# Altium PCB BMS.PcbDoc (part 1 of 2)
Units mil, origin at the board's own origin, x right, y up, seen from the top; angles counter-clockwise.
Board outline 4370 x 2340 mil, 2 copper layers (Top Layer, Bottom Layer); 173 components, 136 nets, 585 pads, 275 vias.
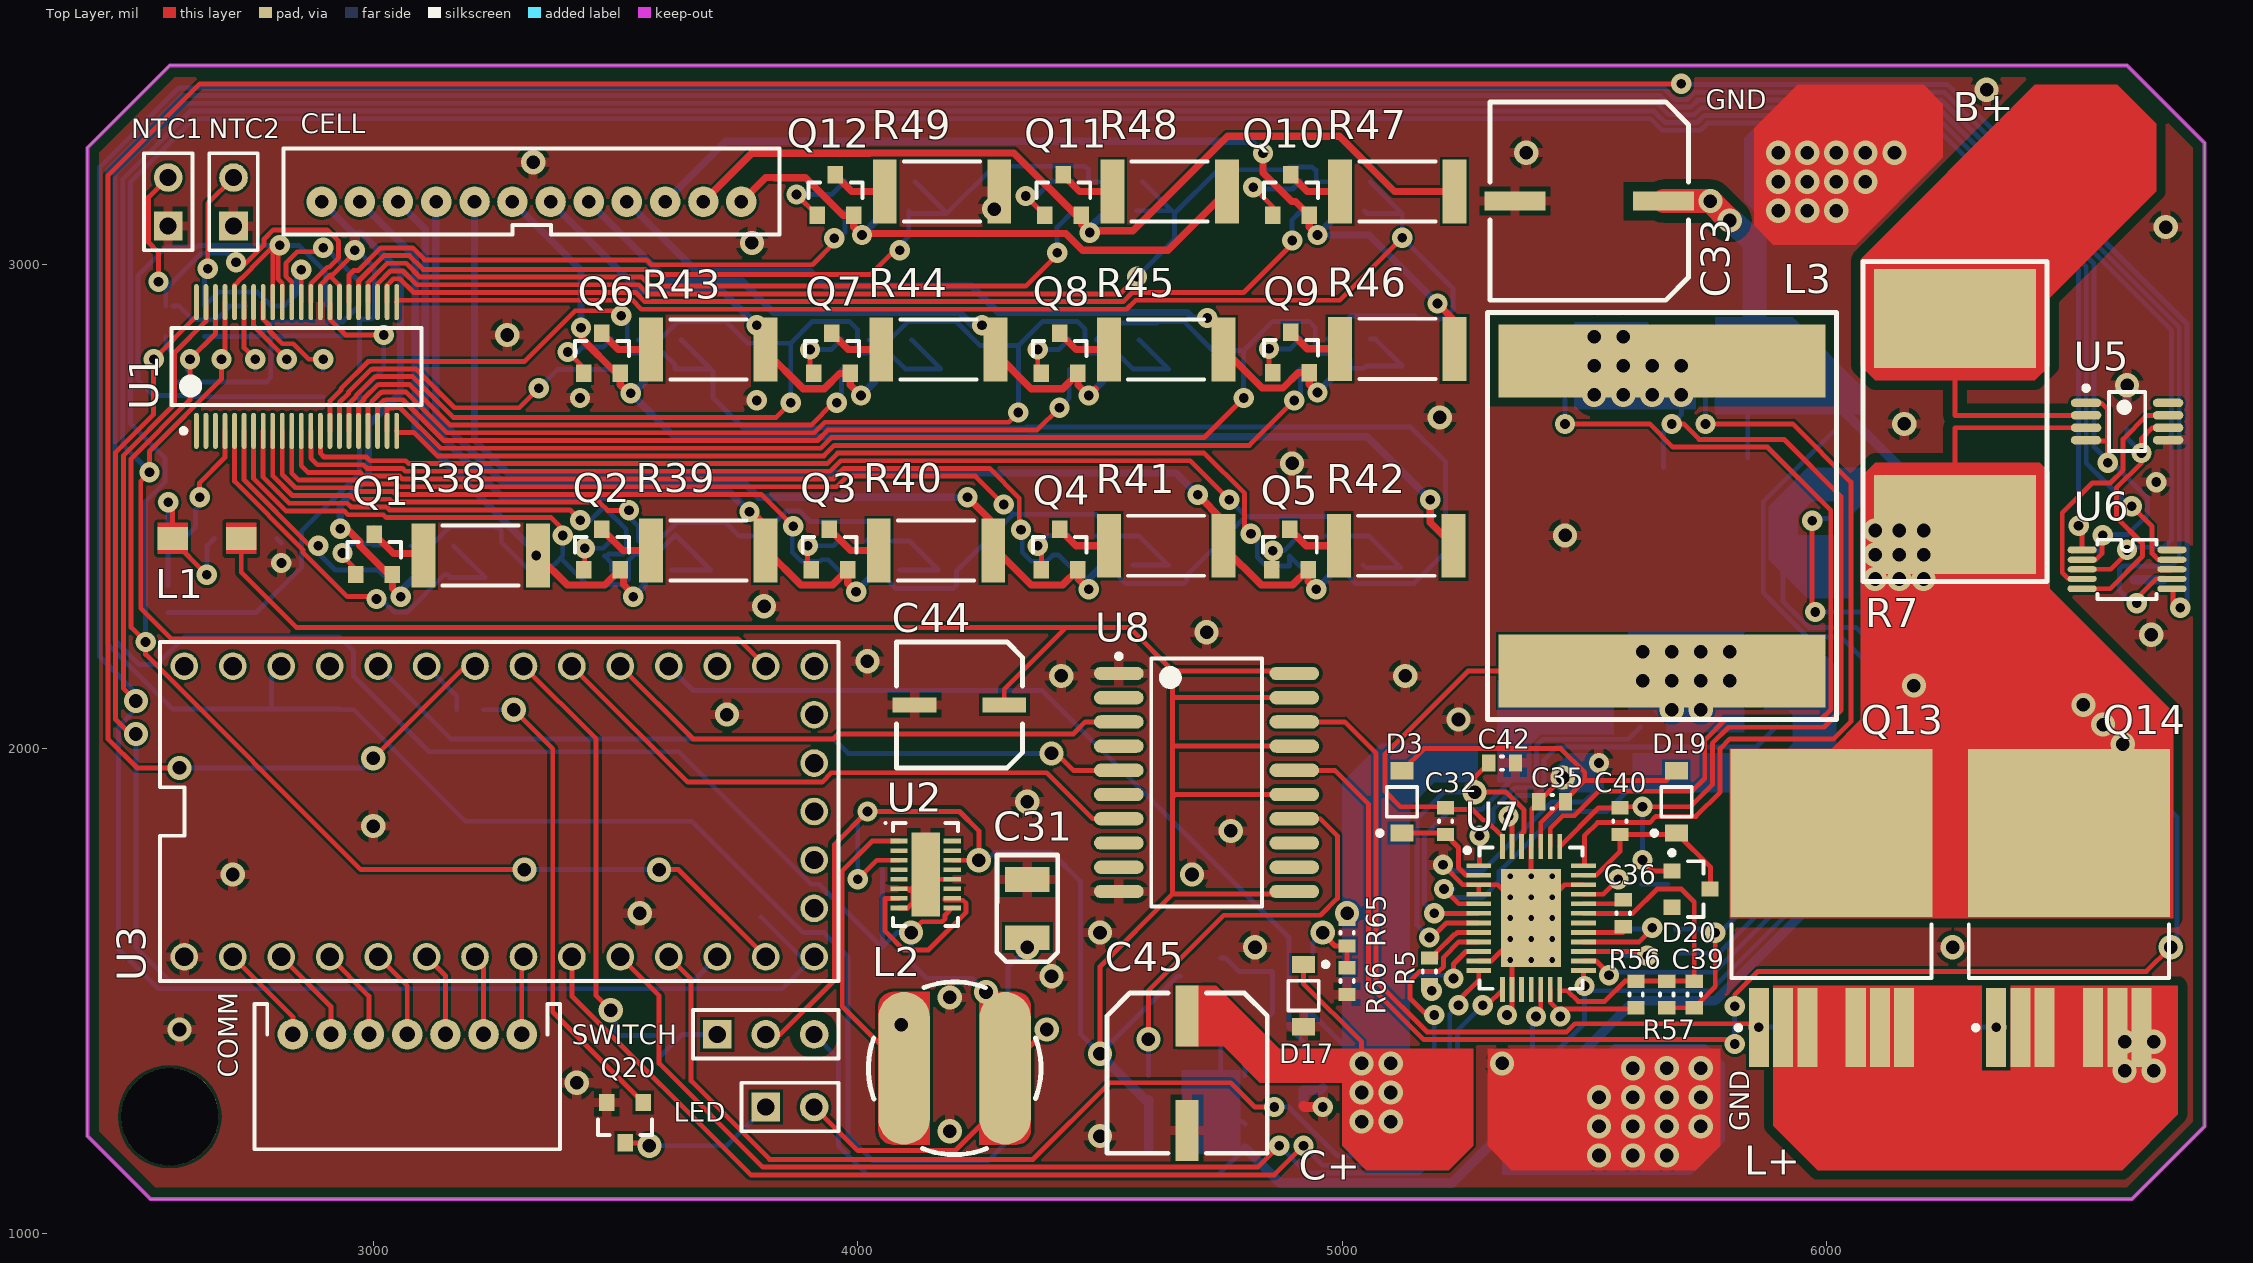
[diagram p0: Top Layer view]
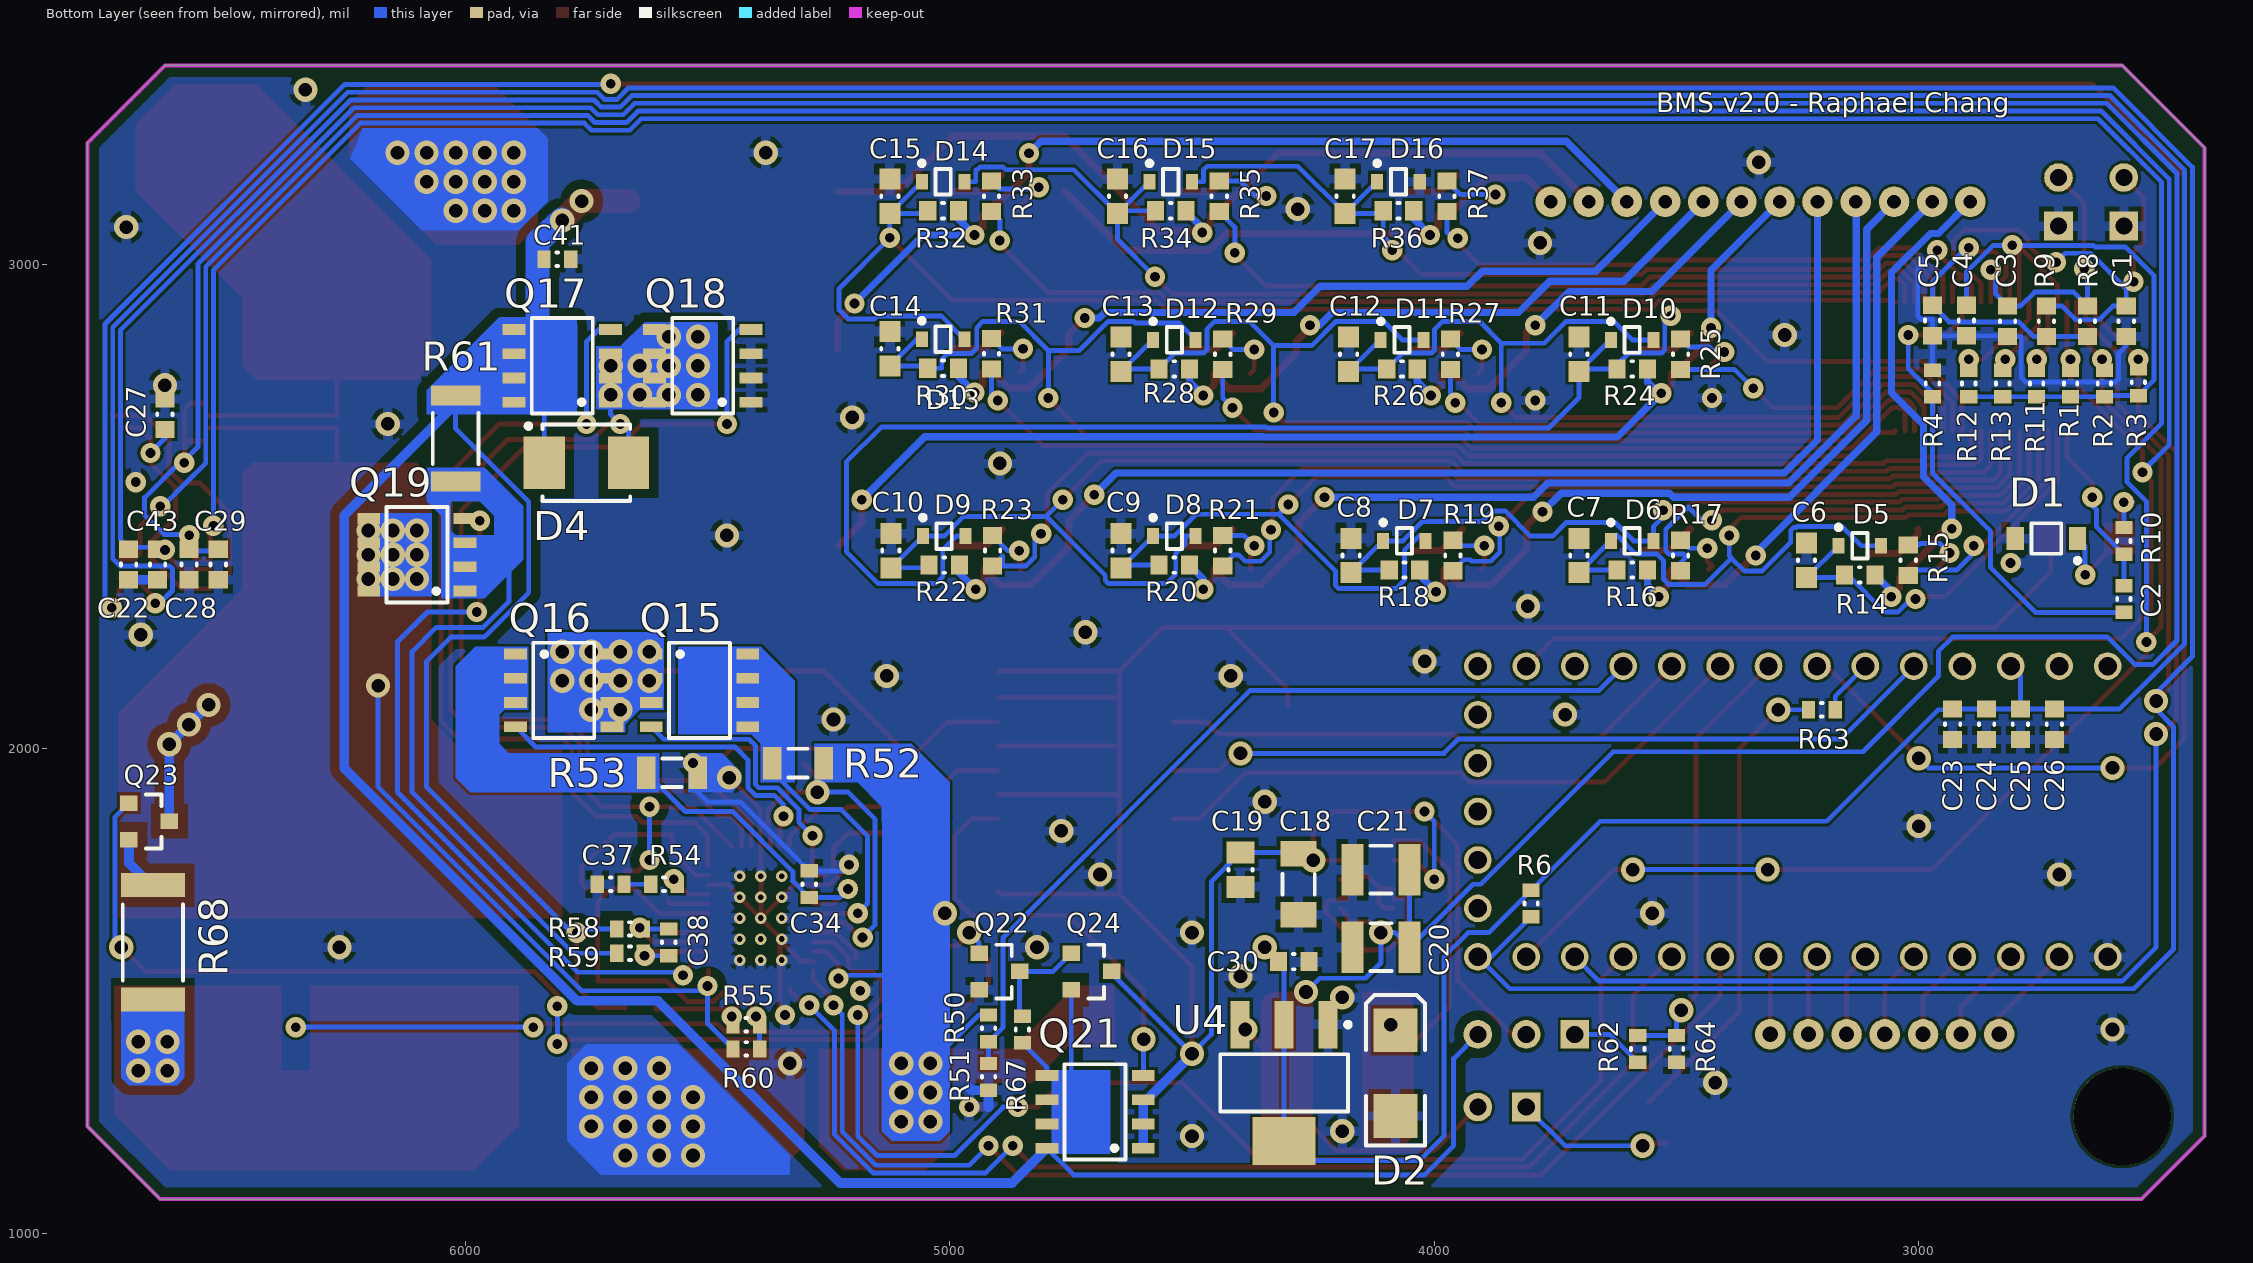
[diagram p1: Bottom Layer view, seen from below]

## Layer stack, top to bottom
Top Solder: solder mask 0.4, Solder Resist, Dk 3.5
Top Layer: signal copper 1.4
Dielectric 1: dielectric 12.6, FR-4, Dk 4.8
Bottom Layer: signal copper 1.4
Bottom Solder: solder mask 0.4, Solder Resist, Dk 3.5

## Board outline
2410,1200 2540,1070 6630,1070 6780,1220 6780,3250 6620,3410 2580,3410 2410,3240

## Design rules (kind name [scope] priority, off if disabled: settings)
Clearance Clearance_12 [InNet('VOUT') vs InNet('GND')] p1: gap=19.68
Clearance Clearance_4 [InNet('GND') vs InNet('VDD')] p2: gap=7.87
Clearance Clearance_11 [InNet('GND') vs InNet('NetQ19_3')] p3: gap=19.68
Clearance Clearance_10 [InNet('GND') vs InNet('NetC40_2')] p4: gap=19.68
Clearance Clearance_9 [InNet('GND') vs OnLayer('Keep-Out Layer')] p5: gap=20
Clearance Clearance_8 [InNet('NetQ17_2') vs InNet('GND')] p6: gap=19.68
Clearance Clearance_7 [InNet('NetQ23_3') vs InNet('GND')] p7: gap=19.68
Clearance Clearance_6 [InNet('NetD4_1') vs InNet('GND')] p8: gap=19.68
Clearance Clearance_5 [InNet('NetC33_1') vs InNet('GND')] p9: gap=19.68
Clearance Clearance_3 [InNet('L+') vs InNet('GND')] p10: gap=19.68
Clearance Clearance_2 [InNet('B+') vs InNet('GND')] p11: gap=19.68
Clearance Clearance_1 [InNet('VBB') vs InNet('GND')] p12: gap=19.68
Clearance [All] p13: gap=5.91
HoleSize [All] p1: absolutevalues=TRUE maxlimit=500 minlimit=1 maxpercent=80.000 minpercent=20.000
PolygonConnect [All] p1: connectstyle=Relief reliefconductorwidth=20 reliefentries=4 polygonreliefangle="90 Angle" airgapwidth=10
RoutingVias [All] p1: holewidth=28 width=50 viastyle="Through Hole" minholewidth=20 minwidth=40 maxholewidth=28 maxwidth=50
SolderMaskExpansion [All] p1: expansion=4
Width [All] p1: maxlimit=500 minlimit=10 preferedwidth=10 minimp=50.000000 maximp=50.000000 favimp=50.000000
29 further rules are at their usual default settings.

## Classes and differential pairs
component class U_Charging: C32 C33 C34 C35 C36 C37 C38 C39 C40 C41 C42 C45 D3 D4 D17 D19 D20 L3 Q15 Q16 Q17 Q18 Q19 Q22 Q24 R5 R50 R51 R52 R53 R54 R55 R56 R57 R58 R59 R60 R61 R65 R66 R67 U7
component class U_LTC6803: C1 C2 C3 C4 C5 C6 C7 C8 C9 C10 C11 C12 C13 C14 C15 C16 C17 CELL D1 D5 D6 D7 D8 D9 D10 D11 D12 D13 D14 D15 D16 L1 NTC1 NTC2 Q1 Q2 Q3 Q4 Q5 Q6 Q7 Q8 Q9 Q10 Q11 Q12 R1 R2 R3 R4 R8 R9 R10 R11 R12 R13 R14 R15 R16 R17 R18 R19 R20 R21 R22 R23 R24 R25 R26 R27 R28 R29 R30 R31 R32 R33 R34 R35 R36 R37 R38 R39 R40 R41 R42 R43 R44 R45 R46 R47 R48 R49 U1
component class U_MCU: C18 C19 C20 C21 C22 C23 C24 C25 C26 C27 C28 C29 C30 C31 C43 C44 COMM D2 L2 LED Q13 Q14 Q20 Q21 Q23 R6 R7 R62 R63 R64 R68 SWITCH U2 U3 U4 U5 U6 U8

## Components (designator, comment, footprint, x,y, rotation, side; value= is the part's Value field where it differs from the comment)
C1 "1uF" CAPC0603(1608)100_N 2571.57,2882.09 r90 bottom
C2 "100nF" CAPC0603(1608)100_L 2576.57,2308.58 r90 bottom
C3 "1uF" CAPC0603(1608)100_N 2816.57,2882.09 r90 bottom
C4 "1uF" CAPC0603(1608)100_N 2901.57,2883.58 r90 bottom
C5 "1uF" CAPC0603(1608)100_N 2971.57,2883.58 r90 bottom
C6 "100nF" CAPC0603(1608)100_M 3231.57,2388.58 r270 bottom
C7 "100nF" CAPC0603(1608)100_M 3701.57,2398.58 r270 bottom
C8 "100nF" CAPC0603(1608)100_M 4171.57,2398.58 r270 bottom
C9 "100nF" CAPC0603(1608)100_M 4646.57,2408.58 r270 bottom
C10 "100nF" CAPC0603(1608)100_M 5121.57,2408.58 r270 bottom
C11 "100nF" CAPC0603(1608)100_M 3701.57,2813.58 r270 bottom
C12 "100nF" CAPC0603(1608)100_M 4176.57,2813.58 r270 bottom
C13 "100nF" CAPC0603(1608)100_M 4646.57,2813.58 r270 bottom
C14 "100nF" CAPC0603(1608)100_M 5123.85,2825 r270 bottom
C15 "100nF" CAPC0603(1608)100_M 5123.85,3140 r270 bottom
C16 "100nF" CAPC0603(1608)100_M 4653.85,3140 r270 bottom
C17 "100nF" CAPC0603(1608)100_M 4183.85,3140 r270 bottom
C18 "10uF" CAPC1206(3216)190_M 4280,1720 r90 bottom
C19 "4.7uF" CAPC0805(2012)145_N 4400,1750 r270 bottom
C20 "100uF" CAPC1210(3225)280_N 4110,1590 r180 bottom
C21 "100uF" CAPC1210(3225)280_N 4110,1750 r180 bottom
C22 "2.2uF" CAPC0603(1608)55_N 6695,2380 r90 bottom
C23 "2.2uF" CAPC0603(1608)55_N 2930,2050 r90 bottom
C24 "2.2uF" CAPC0603(1608)55_N 2860,2050 r90 bottom
C25 "2.2uF" CAPC0603(1608)55_N 2790,2050 r90 bottom
C26 "2.2uF" CAPC0603(1608)55_N 2720,2050 r90 bottom
C27 "0.1uF" CAPC0603(1608)55_N 6620,2690 r270 bottom
C28 "2.2uF" CAPC0603(1608)100_N 6570,2380 r90 bottom
C29 "2.2uF" CAPC0603(1608)100_N 6510,2380 r90 bottom
C30 "2.2uF" CAPC0603(1608)55_N 4290,1560 r180 bottom
C31 "100uF" AVX-CAPC7343_V 4350,1670 r90 top
C32 "1uF" CAPC0603(1608)100_L 5213.31,1850 r90 top
C33 "" "CAP 180UF 50V" 5510,3130 r270 top
C34 "33nF" CAPC0603(1608)100_L 5290,1720 r90 bottom
C35 "4.7uF" CAPC0603(1608)55_L 5433.31,1890 r0 top
C36 "2nF" CAPC0603(1608)100_L 5580,1660 r90 top
C37 "680pF" CAPC0603(1608)100_L 5700,1720 r0 bottom
C38 "0.33uF" CAPC0603(1608)100_L 5580,1600 r90 bottom
C39 "1.5nF" CAPC0603(1608)100_L 5726.69,1492.44 r270 top
C40 "1uF" CAPC0603(1608)100_L 5573.31,1850 r90 top
C41 "0.1uF" CAPC0603(1608)100_L 5810,3010 r0 bottom
C42 "1uF" CAPC0603(1608)100_L 5330,1970 r180 top
C43 "2.2uF" CAPC0603(1608)55_N 6635,2380 r90 bottom
C44 "" "CAP 300UF 6.3V" 4210,2090 r270 top
C45 "150uF" "CAP 150UF 25V" 4680,1330 r0 top
CELL "" JST-6-PTH-VERT 3326.57,3128.58 r0 top (schematic designator JP1)
COMM "" JST-7-PTH 3070,1410 r180 top (schematic designator JP2)
D1 "" SOD-123 2736.57,2433.58 r0 bottom
D2 "" SMB 4080,1330 r90 bottom
D3 "SBR0560S1" SOD-123 5123.31,1890 r90 top
D4 "MBRS360" ONSC-SMB-2-403A-03_H_V 5750,2590 r180 bottom
D5 "" ONSC-SOD-323-2-477-02_V 3121.57,2418.58 r180 bottom
D6 "" ONSC-SOD-323-2-477-02_V 3591.57,2428.58 r180 bottom
D7 "" ONSC-SOD-323-2-477-02_V 4061.57,2428.58 r180 bottom
D8 "" ONSC-SOD-323-2-477-02_V 4536.57,2438.58 r180 bottom
D9 "" ONSC-SOD-323-2-477-02_V 5011.57,2438.58 r180 bottom
D10 "" ONSC-SOD-323-2-477-02_V 3591.57,2843.58 r180 bottom
D11 "" ONSC-SOD-323-2-477-02_V 4066.57,2843.58 r180 bottom
D12 "" ONSC-SOD-323-2-477-02_V 4536.57,2843.58 r180 bottom
D13 "" ONSC-SOD-323-2-477-02_V 5013.85,2845 r180 bottom
D14 "" ONSC-SOD-323-2-477-02_V 5013.85,3170 r180 bottom
D15 "" ONSC-SOD-323-2-477-02_V 4543.85,3170 r180 bottom
D16 "" ONSC-SOD-323-2-477-02_V 4073.85,3170 r180 bottom
D17 "" ONSC-SOD-123-2-425-04_V 4920,1490 r270 top
D19 "SBR0560S1" SOD-123 5690,1890 r90 top
D20 "BZX84C6V2L" ONSC-SOT-23-3-318-08_V 5720,1710 r0 top
L1 "" MURA-BLM31-B60-CHIP-2_V3 2656.57,2433.58 r180 top
L2 "SDR0805-180ML" SDR0805-180ML 4200,1340 r0 top
L3 "22uH" IHLP-6767GZ 5660,2480 r90 top
LED "Header 2" HDR1X2 3810,1260 r0 top (schematic designator P4)
NTC1 "Header 2" HDR1X2 2576.57,3078.58 r90 top (schematic designator P1)
NTC2 "Header 2" HDR1X2 2711.57,3078.58 r90 top (schematic designator P2)
Q1 "MOSFET-P" SOT23-3 3001.57,2398.58 r0 top
Q2 "MOSFET-P" SOT23-3 3471.57,2408.58 r0 top
Q3 "MOSFET-P" SOT23-3 3941.57,2408.58 r0 top
Q4 "MOSFET-P" SOT23-3 4416.57,2408.58 r0 top
Q5 "MOSFET-P" SOT23-3 4891.57,2408.58 r0 top
Q6 "MOSFET-P" SOT23-3 3471.57,2813.58 r0 top
Q7 "MOSFET-P" SOT23-3 3946.57,2813.58 r0 top
Q8 "MOSFET-P" SOT23-3 4416.57,2813.58 r0 top
Q9 "MOSFET-P" SOT23-3 4893.85,2815 r0 top
Q10 "MOSFET-P" SOT23-3 4893.85,3140 r0 top
Q11 "MOSFET-P" SOT23-3 4423.85,3140 r0 top
Q12 "MOSFET-P" SOT23-3 3953.85,3140 r0 top
Q13 "MOSFET-N" DPAK127P1525X483-7N 6010,1670 r90 top
Q14 "MOSFET-N" DPAK127P1525X483-7N 6500,1670 r90 top
Q15 "MOSFET-N" SOIC127P600X175-8N 5516.69,2120 r180 bottom
Q16 "MOSFET-N" SOIC127P600X175-8N 5796.69,2120 r180 bottom
Q17 "MOSFET-N" SOIC127P600X175-8N 5800,2790 r0 bottom
Q18 "MOSFET-N" SOIC127P600X175-8N 5510,2790 r0 bottom
Q19 "MOSFET-P" SOIC127P600X175-8N 6100,2400 r0 bottom
Q20 "MOSFET-N" SOT23-3 3520,1230 r180 top
Q21 "MOSFET-N" SOIC127P600X175-8N 4700,1250 r0 bottom
Q22 "MOSFET-N" SOT23-3 4900,1540 r270 bottom
Q23 "MOSFET-N" SOT23-3 6655,1850 r270 bottom
Q24 "MOSFET-P" SOT23-3 4710,1540 r270 bottom
R1 "1M" RESC0603(1608)_L 2686.57,2753.58 r90 bottom
R2 "1M" RESC0603(1608)_L 2616.57,2753.58 r90 bottom
R3 "1M" RESC0603(1608)_L 2546.57,2756.02 r90 bottom
R4 "100R" RESC0603(1608)_L 2971.57,2753.58 r270 bottom
R5 "120K" RESC0603(1608)_L 5180,1540 r270 top
R6 "1K" RESC0603(1608)_L 3800,1680 r270 bottom
R7 "" WSLP5931 6265,2675 r90 top
R8 "100K" RESC0603(1608)_N 2651.57,2882.09 r270 bottom
R9 "100K" RESC0603(1608)_N 2736.57,2882.09 r270 bottom
R10 "100R" RESC0603(1608)_L 2576.57,2428.58 r90 bottom
R11 "1M" RESC0603(1608)_L 2756.57,2753.58 r90 bottom
R12 "1M" RESC0603(1608)_L 2896.57,2753.58 r90 bottom
R13 "1M" RESC0603(1608)_L 2826.57,2753.58 r90 bottom
R14 "100R" RESC0603(1608)_N 3121.57,2358.58 r180 bottom
R15 "3K3" RESC0603(1608)_N 3021.57,2388.58 r90 bottom
R16 "100R" RESC0603(1608)_N 3591.57,2368.58 r180 bottom
R17 "3K3" RESC0603(1608)_N 3491.57,2398.58 r90 bottom
R18 "100R" RESC0603(1608)_N 4061.57,2368.58 r180 bottom
R19 "3K3" RESC0603(1608)_N 3961.57,2398.58 r90 bottom
R20 "100R" RESC0603(1608)_N 4536.57,2378.58 r180 bottom
R21 "3K3" RESC0603(1608)_N 4436.57,2408.58 r90 bottom
R22 "100R" RESC0603(1608)_N 5011.57,2378.58 r180 bottom
R23 "3K3" RESC0603(1608)_N 4911.57,2408.58 r90 bottom
R24 "100R" RESC0603(1608)_N 3591.57,2783.58 r180 bottom
R25 "3K3" RESC0603(1608)_N 3491.57,2813.58 r90 bottom
R26 "100R" RESC0603(1608)_N 4066.57,2783.58 r180 bottom
R27 "3K3" RESC0603(1608)_N 3966.57,2813.58 r90 bottom
R28 "100R" RESC0603(1608)_N 4536.57,2783.58 r180 bottom
R29 "3K3" RESC0603(1608)_N 4436.57,2813.58 r90 bottom
R30 "100R" RESC0603(1608)_N 5013.85,2785 r180 bottom
R31 "3K3" RESC0603(1608)_N 4913.85,2815 r90 bottom
R32 "100R" RESC0603(1608)_N 5013.85,3110 r180 bottom
R33 "3K3" RESC0603(1608)_N 4913.85,3140 r90 bottom
R34 "100R" RESC0603(1608)_N 4543.85,3110 r180 bottom
R35 "3K3" RESC0603(1608)_N 4443.85,3140 r90 bottom
R36 "100R" RESC0603(1608)_N 4073.85,3110 r180 bottom
R37 "3K3" RESC0603(1608)_N 3973.85,3140 r90 bottom
R38 "3R3" RESC2512(6432)_N 3221.57,2398.58 r180 top
R39 "3R3" RESC2512(6432)_N 3691.57,2408.58 r180 top
R40 "3R3" RESC2512(6432)_N 4161.57,2408.58 r180 top
R41 "3R3" RESC2512(6432)_N 4636.57,2418.58 r180 top
R42 "3R3" RESC2512(6432)_N 5111.57,2418.58 r180 top
R43 "3R3" RESC2512(6432)_N 3691.57,2823.58 r180 top
R44 "3R3" RESC2512(6432)_N 4166.57,2823.58 r180 top
R45 "3R3" RESC2512(6432)_N 4636.57,2823.58 r180 top
R46 "3R3" RESC2512(6432)_N 5113.85,2825 r180 top
R47 "3R3" RESC2512(6432)_N 5113.85,3150 r180 top
R48 "3R3" RESC2512(6432)_N 4643.85,3150 r180 top
R49 "3R3" RESC2512(6432)_N 4173.85,3150 r180 top
R50 "18K" RESC0603(1608)_L 4920,1422.44 r90 bottom
R51 "3K6" RESC0603(1608)_L 4920,1322.44 r90 bottom
R52 "0.004R" RESC1206(3216)_L 5313.31,1970 r180 bottom
R53 "0.004R" RESC1206(3216)_L 5573.31,1950 r0 bottom
R54 "33K" RESC0603(1608)_L 5590,1720 r0 bottom
R55 "10K7" RESC0603(1608)_L 5420,1430 r180 bottom
R56 "10K7" RESC0603(1608)_L 5606.69,1492.44 r90 top
R57 "174K" RESC0603(1608)_L 5670,1492.44 r270 top
R58 "100R" RESC0603(1608)_L 5660,1627.56 r0 bottom
R59 "100R" RESC0603(1608)_L 5660,1577.56 r0 bottom
R60 "174K" RESC0603(1608)_L 5420,1380 r0 bottom
R61 "0.0082R" RESC2010(5025)_L 6020,2640 r90 bottom
R62 "464K" RESC0603(1608)_L 3580,1380 r270 bottom
R63 "100R" RESC0603(1608)_L 3200,2080 r0 bottom
R64 "36K" RESC0603(1608)_L 3500,1380 r90 bottom
R65 "10K" RESC0603(1608)_L 5010,1620 r90 top
R66 "3K6" RESC0603(1608)_L 5010,1520 r90 top
R67 "10K" RESC0603(1608)_L 4850,1420 r270 bottom
R68 "750R" RESC2512(6432)_N 6645,1600 r90 bottom (schematic designator R71)
SWITCH "Header 3" HDR1X3 3710,1410 r0 top (schematic designator P3)
U1 "LTC6803HG-3#PBF" LT-G-44_L 2841.57,2788.58 r90 top
U2 "LTC3637" SON50P300X85_HS-17N 4140,1740 r0 top
U3 "" TEENSY_3.0_BASIC 3260,1870 r90 top
U4 "TC2117" SOT-223-DB3_M 4310,1310 r270 bottom
U5 "LT1999" LT-MS8-8_N 6620,2675 r0 top
U6 "LTC2480" MSOP10 6620,2370 r0 top
U7 "LTC4020EUHF" QFN38 5390,1650 r0 top
U8 "LT1161" LT-SW-20_M 4720,1930 r0 top

## Footprints (in the part's own frame and the unit in brackets; to place one, negate y for a bottom-side part, rotate by r counter-clockwise, add the part's x,y. Pads: shape width x height; smd on the part's side, far side on the other; paste and mask are expansions set on the pad)
AVX-CAPC7343_V [mm] "SMT Capacitor, 2 Leads, Body 7.3x4.3mm"
  rect 1.3x2.35 smd: 1(-1.535,0.001) 2(1.515,0.001)
  silkscreen extent -2.8,-1.6 2.8,1.6, body extent -2.1,-1.1 2.1,1.1, height 1.9
"CAP 150UF 25V" [mm]
  rect 1.2x3.2 smd: 1(0,3) 2(0,-3)
  silkscreen extent -4.2,-4.2 4.2,4.2, body extent -4.25,-5 4.25,5, height 10.5
"CAP 180UF 50V" [mm]
  rect 1x3.2 smd: 1(0,3.9) 2(0,-3.9)
  silkscreen extent -5.2,-5.2 5.2,5.2, body extent -5.2,-5.45 5.1,5.45, height 10.2
"CAP 300UF 6.3V" [mm]
  rect 0.8x2.3 smd: 1(0,2.35) 2(0,-2.35)
  silkscreen extent -3.3,-3.3 3.3,3.3, body extent -3.4,-3.9 3.4,3.9, height 5.5
CAPC0603(1608)55_L [mm] "Chip Capacitor, Body 1.6x0.8mm, Height 0.55mm, IPC High Density"
  rect 0.7x0.9 smd: 1(-0.7,0) 2(0.7,0)
  silkscreen extent -0.05,-0.35 0.05,0.35, body extent -0.87,-0.47 0.88,0.48, height 0.55
CAPC0603(1608)55_N [mm] "Chip Capacitor, Body 1.6x0.8mm, Height 0.55mm, IPC Medium Density"
  rect 0.9x1 smd: 1(-0.8,0) 2(0.8,0)
  silkscreen extent -0.05,-0.4 0.05,0.4, body extent -0.87,-0.48 0.88,0.47, height 0.55
CAPC0603(1608)100_L [mm] "Chip Capacitor, Body 1.6x0.8mm, Height 1.0mm, IPC High Density"
  rect 0.7x0.9 smd: 1(-0.7,0) 2(0.7,0)
  silkscreen extent -0.05,-0.35 0.05,0.35, body extent -0.87,-0.47 0.88,0.48, height 1
CAPC0603(1608)100_M [mm] "Chip Capacitor, Body 1.6x0.8mm, Height 1.0mm, IPC Low Density"
  rect 1.1x1.1 smd: 1(-0.9,0) 2(0.9,0)
  silkscreen extent -0.05,-0.45 0.05,0.45, body extent -0.87,-0.47 0.88,0.48, height 1
CAPC0603(1608)100_N [mm] "Chip Capacitor, Body 1.6x0.8mm, Height 1.0mm, IPC Medium Density"
  rect 0.9x1 smd: 1(-0.8,0) 2(0.8,0)
  silkscreen extent -0.05,-0.4 0.05,0.4, body extent -0.87,-0.48 0.88,0.47, height 1
CAPC0805(2012)145_N [mm] "Chip Capacitor, Body 2.0x1.2mm, Height 1.45mm, IPC Medium Density"
  rect 1.15x1.45 smd: 1(-0.9,0) 2(0.9,0)
  silkscreen extent -0.05,-0.62 0.05,0.63, body extent -1.1,-0.72 1.1,0.73, height 1.45
CAPC1206(3216)190_M [mm] "Chip Capacitor, Body 3.2x1.6mm, Height 1.9mm, IPC Low Density"
  rect 1.35x1.9 smd: 1(-1.6,0) 2(1.6,0)
  silkscreen extent -0.55,-0.85 0.55,0.85, body extent -1.7,-0.9 1.7,0.9, height 1.9
CAPC1210(3225)280_N [mm] "Chip Capacitor, Body 3.2x2.5mm, Height 2.8mm, IPC Medium Density"
  rect 1.15x2.7 smd: 1(-1.5,0) 2(1.5,0)
  silkscreen extent -0.55,-1.25 0.55,1.25, body extent -1.7,-1.4 1.7,1.4, height 2.8
DPAK127P1525X483-7N [mm] "D2-PAK, 7-Pads, Body 7.93x8.63mm (max), IPC Medium Density"
  rect 4.15x1.05 smd mask+0.051: 1(-6.25,3.81) 2(-6.25,-3.81) 2(-6.25,-2.54) 2(-6.25,-1.27) 2(-6.25,1.27) 2(-6.25,2.54)
  rect 8.8x10.6 smd: 8(3.95,0)
  silkscreen extent -6.37,-5.25 -0.85,5.25, body extent -7,-5 8,5, height 4.2
HDR1X2 [mm] "Connector; Header; 2 Position"
  rect 1.5x1.5 hole 0.9: 1(0,0)
  round 1.5 hole 0.9: 2(2.54,0)
  silkscreen extent -1.27,-1.27 3.81,1.27
HDR1X3 [mm] "Connector; Header; 3 Position"
  rect 1.5x1.5 hole 0.9: 1(0,0)
  round 1.5 hole 0.9: 2(2.54,0) 3(5.08,0)
  silkscreen extent -1.27,-1.27 6.35,1.27
IHLP-6767GZ [mil]
  rect 150x675 smd: 1(-320,0) 2(320,0)
  silkscreen extent -420,-360 420,360, body extent -331,-331 331,331, height 197
JST-6-PTH-VERT [mil]
  round 63 hole 28: 1(-433.07,0) 2(-354.33,0) 3(-275.59,0) 4(-196.59,0) 5(-117.59,0) 6(-39.37,0) 7(39.37,0) 8(118.11,0) 9(196.85,0) 10(275.85,0) 11(354.85,0) 12(433.07,0)
  silkscreen extent -512,-68 512,110, body extent -512,-71 508,106, height 236
JST-7-PTH [mil]
  round 63 hole 31.5: 1(-236.48,0) 2(-157.74,0) 3(-79,0) 4(0,0) 5(79,0) 6(157.22,0) 7(235.96,0)
  silkscreen extent -315,-63 315,237, body extent -356,-8 350,252, height 198
LT-G-44_L [mm] "SOP, 44-Leads, Body 13.1x5.6mm, Pitch 0.5mm, IPC High Density"
  oval 1.9x0.25 smd: 1(-3.375,5.25) 2(-3.375,4.75) 3(-3.375,4.25) 4(-3.375,3.75) 5(-3.375,3.25) 6(-3.375,2.75) 7(-3.375,2.25) 8(-3.375,1.75) 9(-3.375,1.25) 10(-3.375,0.75) 11(-3.375,0.25) 12(-3.375,-0.25) 13(-3.375,-0.75) 14(-3.375,-1.25) 15(-3.375,-1.75) 16(-3.375,-2.25) 17(-3.375,-2.75) 18(-3.375,-3.25) 19(-3.375,-3.75) 20(-3.375,-4.25) 21(-3.375,-4.75) 22(-3.375,-5.25) 23(3.375,-5.25) 24(3.375,-4.75) 25(3.375,-4.25) 26(3.375,-3.75) 27(3.375,-3.25) 28(3.375,-2.75) 29(3.375,-2.25) 30(3.375,-1.75) 31(3.375,-1.25) 32(3.375,-0.75) 33(3.375,-0.25) 34(3.375,0.25) 35(3.375,0.75) 36(3.375,1.25) 37(3.375,1.75) 38(3.375,2.25) 39(3.375,2.75) 40(3.375,3.25) 41(3.375,3.75) 42(3.375,4.25) 43(3.375,4.75) 44(3.375,5.25)
  silkscreen extent -3.5,-6.55 2.02,6.55, body extent -2.8,-6.55 2.8,6.55, height 2
LT-MS8-8_N [mm] "SOP, 8-Leads, Body 3x3mm, Pitch 0.65mm, IPC Medium Density"
  oval 1.6x0.45 smd: 1(-2.15,0.975) 2(-2.15,0.325) 3(-2.15,-0.325) 4(-2.15,-0.975) 5(2.15,-0.975) 6(2.15,-0.325) 7(2.15,0.325) 8(2.15,0.975)
  silkscreen extent -2.27,-1.55 0.95,1.87, body extent -1.55,-1.55 1.55,1.55, height 1.1
LT-SW-20_M [mm] "SOIC, 20-Leads, Body 12.8x7.49mm, Pitch 1.27mm, IPC Low Density"
  oval 2.6x0.7 smd: 1(-4.6,5.715) 2(-4.6,4.445) 3(-4.6,3.175) 4(-4.6,1.905) 5(-4.6,0.635) 6(-4.6,-0.635) 7(-4.6,-1.905) 8(-4.6,-3.175) 9(-4.6,-4.445) 10(-4.6,-5.715) 11(4.6,-5.715) 12(4.6,-4.445) 13(4.6,-3.175) 14(4.6,-1.905) 15(4.6,-0.635) 16(4.6,0.635) 17(4.6,1.905) 18(4.6,3.175) 19(4.6,4.445) 20(4.6,5.715)
  silkscreen extent -4.72,-6.5 2.9,6.74, body extent -3.8,-6.5 3.8,6.5, height 2.65
MSOP10 [mm]
  oval 1.53x0.36 smd mask+0.076: 0(-2.352,1.02) 4(-2.352,-1.02) 5(2.353,1.02) 9(2.353,-1.02)
  oval 1.53x0.32 smd mask+0.076: 1(-2.352,0.5) 2(-2.352,0) 3(-2.352,-0.5) 6(2.353,0.5) 7(2.353,0) 8(2.353,-0.5)
  silkscreen extent -1.55,-1.55 1.55,1.55, body extent -1.5,-1.5 1.5,1.5, height 1
MURA-BLM31-B60-CHIP-2_V3 [mm] "Chip Ferrite Bead, 2-Leads, Body 3.2x1.6mm, Height 1.3mm, 70um Land Pad Thickness, 6A Rated Current"
  rect 1.6x1.2 smd: 1(-1.8,0) 2(1.8,0)
  Top Layer region: 2.6,0.825 1,0.825 1,-0.825 2.6,-0.825
  Top Layer region: -2.6,-0.825 -1,-0.825 -1,0.825 -2.6,0.825
  body extent -1.6,-0.8 1.6,0.8, height 1.3
ONSC-SMB-2-403A-03_H_V [mil] "Molded, 2-Leads, Body 4.6x3.95mm"
  rect 85x107.99 smd: 1(-87.01,0) 2(87.01,0)
  silkscreen extent -125,-79 91,81, body extent -91,-78 91,78, height 95
ONSC-SOD-123-2-425-04_V [mm] "SOD, 2-Leads, Body 2.69x1.6mm"
  rect 0.91x1.22 smd: 1(-1.635,0) 2(1.635,0)
  silkscreen extent -1.76,-0.8 0.78,1.29, body extent -1.35,-0.8 1.35,0.8, height 1.35
ONSC-SOD-323-2-477-02_V [mm] "SOD, 2-Leads, Body 1.7x1.25mm"
  rect 0.63x0.83 smd: 1(-1.115,0) 2(1.115,0)
  silkscreen extent -1.24,-0.67 0.4,1.09, body extent -0.85,-0.63 0.85,0.63, height 1.06
ONSC-SOT-23-3-318-08_V [mm] "SOT23, 3-Leads, Body 2.92x1.3mm, Pitch 0.95mm"
  rect 0.9x0.8 smd: 1(-1,0.95) 2(-1,-0.95) 3(1,0)
  silkscreen extent -1.12,-1.46 0.65,2.02, body extent -0.65,-1.46 0.65,1.46, height 1.11
QFN38 [mm] "QFN, 38-Leads, Body 5,00x7,00mm, Pitch 0,50mm, Thermal Pad 3,25x5,75mm, IPC Medium Density"
  rect 1.3x0.25 smd: 1(-2.75,2.75) 2(-2.75,2.25) 3(-2.75,1.75) 4(-2.75,1.25) 5(-2.75,0.75) 6(-2.75,0.25) 7(-2.75,-0.25) 8(-2.75,-0.75) 9(-2.75,-1.25) 10(-2.75,-1.75) 11(-2.75,-2.25) 12(-2.75,-2.75) 20(2.75,-2.75) 21(2.75,-2.25) 22(2.75,-1.75) 23(2.75,-1.25) 24(2.75,-0.75) 25(2.75,-0.25) 26(2.75,0.25) 27(2.75,0.75) 28(2.75,1.25) 29(2.75,1.75) 30(2.75,2.25) 31(2.75,2.75)
  rect 0.25x1.3 smd: 13(-1.5,-3.75) 14(-1,-3.75) 15(-0.5,-3.75) 16(0,-3.75) 17(0.5,-3.75) 18(1,-3.75) 19(1.5,-3.75) 32(1.5,3.75) 33(1,3.75) 34(0.5,3.75) 35(0,3.75) 36(-0.5,3.75) 37(-1,3.75) 38(-1.5,3.75)
  rect 3.15x5.15 smd: 39(0,0)
  silkscreen extent -3.47,-3.7 2.7,3.7, body extent -2.55,-3.55 2.55,3.55, height 0.75
RESC0603(1608)_L [mm] "Chip Resistor, Body 1.6x0.8mm, IPC High Density"
  rect 0.7x0.9 smd: 1(-0.7,0) 2(0.7,0)
  silkscreen extent -0.05,-0.35 0.05,0.35, body extent -0.85,-0.47 0.85,0.47, height 0.6
RESC0603(1608)_N [mm] "Chip Resistor, Body 1.6x0.8mm, IPC Medium Density"
  rect 0.9x1 smd: 1(-0.8,0) 2(0.8,0)
  silkscreen extent -0.05,-0.4 0.05,0.4, body extent -0.85,-0.47 0.85,0.47, height 0.6
RESC1206(3216)_L [mm] "Chip Resistor, Body 3.2x1.6mm, IPC High Density"
  rect 0.95x1.7 smd: 1(-1.35,0) 2(1.35,0)
  silkscreen extent -0.5,-0.75 0.5,0.75, body extent -1.67,-0.87 1.67,0.87, height 0.75
RESC2010(5025)_L [mm] "Chip Resistor, Body 5.0x2.5mm, IPC High Density"
  rect 1.05x2.6 smd: 1(-2.25,0) 2(2.25,0)
  silkscreen extent -1.35,-1.2 1.35,1.2, body extent -2.6,-1.35 2.6,1.35, height 0.71
RESC2512(6432)_N [mm] "Chip Resistor, Body 6.4x3.2mm, IPC Medium Density"
  rect 1.25x3.35 smd: 1(-3,0) 2(3,0)
  silkscreen extent -2,-1.57 2,1.58, body extent -3.25,-1.7 3.25,1.7, height 0.75
SDR0805-180ML [mm]
  rrect100% 2.7x8 smd: 1(-2.65,0) 2(2.65,0)
  Top Layer region: -3.25,4 -1.3,4 -1.3,-4 -3.25,-4 -3.537,-3.943 -3.78,-3.78 -3.943,-3.537 -4,-3.25 -4,-3.25 -4,3.25 -3.943,3.537 -3.78,3.78 -3.537,3.943 -3.25,4
  Top Layer region: 3.25,4 1.3,4 1.3,-4 3.25,-4 3.537,-3.943 3.78,-3.78 3.943,-3.537 4,-3.25 4,-3.25 4,3.25 3.943,3.537 3.78,3.78 3.537,3.943 3.25,4
  silkscreen extent -4.52,-4.53 4.52,4.52, body extent -3.9,-3.9 3.9,3.9, height 5.3
SMB [mm] "DO-214-AA/SMB; 2 C-Bend Leads; Body 5.3 x 3.6 mm, inc. leads (LxW)"
  rect 2.3x2.3 smd: 1(-2.25,0) 2(2.25,0)
  silkscreen extent -3.8,-1.55 4.1,1.55
SOD-123 [mm] "SOD, 2-Leads, Body 2.69x1.6mm"
  rect 0.91x1.22 smd: 1(-1.635,0) 2(1.635,0)
  silkscreen extent -1.76,-0.8 0.78,1.28, body extent -1.35,-0.8 1.35,0.8, height 1.35
SOIC127P600X175-8N [mm] "SOIC, 8-Leads, Body 4.90x3.90mm, Pitch 1.27mm, IPC Medium Density"
  rect 1.194x0.56 smd: 1(-2.528,-0.635) 1(-2.528,0.635) 1(-2.528,1.905) 2(-2.528,-1.905) 3(2.527,-1.905) 3(2.527,-0.635) 3(2.527,0.635) 3(2.527,1.905)
  Top Layer region: -0.8,2.2 2.3,2.2 2.3,-2.2 -0.8,-2.2
  silkscreen extent -1.6,-2.5 1.6,2.5
SON50P300X85_HS-17N [mm] "SON, 16-Leads, Body 5.00x3.00mm, Pitch 0.50mm, Thermal Pad 4.40x1.49mm, IPC Medium Density"
  rect 0.9x0.25 smd mask+0.076: 1(-1.395,1.75) 2(-1.395,1.25) 3(-1.395,0.75) 4(-1.395,0.25) 5(-1.395,-0.25) 6(-1.395,-0.75) 7(-1.395,-1.25) 8(-1.395,-1.75) 9(1.395,-1.75) 10(1.395,-1.25) 11(1.395,-0.75) 12(1.395,-0.25) 13(1.395,0.25) 14(1.395,0.75) 15(1.395,1.25) 16(1.395,1.75)
  rect 1.49x4.4 smd mask+0.076: 17(0,0)
  silkscreen extent -2.15,-2.7 1.7,2.75, body extent -1.56,-2.05 1.56,2.05, height 0.8
SOT23-3 [mil]
  rect 32x36 smd: 1(-37.4,-39.37) 2(0,44) 3(38,-39.37)
  silkscreen extent -55,-4 56,28
SOT-223-DB3_M [mm] "SOT223, 4-Leads, Body 6.5x3.5mm, Pitch 2.3mm, Lead Span 7mm, IPC Low Density"
  rect 2.5x1 smd: 1(-3.05,2.3) 2(-3.05,0) 3(-3.05,-2.3)
  rect 2.5x3.3 smd: 2(3.05,0)
  silkscreen extent -3.17,-3.35 1.5,3.47, body extent -1.85,-3.35 1.85,3.35, height 1.8
TEENSY_3.0_BASIC [mil]
  round 57 hole 38: 0(-300,550) 1(-300,450) 2(-300,350) 3(-300,250) 3.3V(300,450) 3.3V1(-100,-650) 4(-300,150) 5(-300,50) 6(-300,-50) 7(-300,-150) 8(-300,-250) 9(-300,-350) 10(-300,-450) 11(-300,-550) 12(-300,-650) 13(300,-650) 14/A0(300,-550) 15/A1(300,-450) 16/A2(300,-350) 17/A3(300,-250) 18/A4(300,-150) 19/A5(300,-50) 20/A6(300,50) 21/A7(300,150) 22/A8(300,250) 23/A9(300,350) AGND(300,550) GND(-300,650) GND1(0,-650) PGM(100,-650) RESET(200,-650) VBAT(-200,-650) VIN(300,650)
  silkscreen extent -350,-700 350,700, body extent -348,-708 349,720, height 505
WSLP5931 [mil]
  rect 205x334 smd: 1(-212.5,0) 2(212.5,0)
  silkscreen extent -330,-190 330,190, body extent -311,-165 311,165, height 20

## Part data
C1 C3 C4 C5 C29: library part CMP-1035-02730-1, "CAP 1uF 6.3V ±10% 0603 (1608 Metric) Thickness 1mm SMD"
C2: library part CMP-1035-02595-1, "CAP 100nF 100V ±10% 0603 (1608 Metric) Thickness 1mm SMD"
C6 C7 C8 C9 C10 C11 C12 C13 C14 C15 C16 C17 C28: library part CMP-1035-02575-1, "CAP 100nF 6.3V ±5% 0603 (1608 Metric) Thickness 1mm SMD"
C18: library part CMP-1037-04982-1, "CAP 10uF 50V ±10% 1206 (3216 Metric) Thickness 1.9mm SMD"
C19: library part CMP-1036-04900-1, "CAP 4.7uF 50V ±10% 0805 (2012 Metric) Thickness 1.45mm SMD"
C20 C21: library part CMP-1038-02301-1, "CAP 100uF 10V ±10% 1210 (3225 Metric) Thickness 2.8mm SMD"
C22 C43: library part CMP-1035-02751-1, "CAP 2.2uF 4V ±10% 0603 (1608 Metric) Thickness 0.55mm SMD"
C23 C24 C25 C26 C27 C30: library part CMP-1035-02762-1, "CAP 2.2uF 16V ±10% 0603 (1608 Metric) Thickness 0.55mm SMD"
C31: library part AVX-CAP-P-2
C32 C40 C42: library part CMP-1035-02740-1, "CAP 1uF 25V ±10% 0603 (1608 Metric) Thickness 1mm SMD"
C33: library part "CAP 180uF 50V", "Polarized Capacitor (Axial)"
C34: library part CMP-1035-02463-1, "CAP 33nF 25V ±5% 0603 (1608 Metric) Thickness 1mm SMD"
C35: library part CMP-1035-02779-1, "CAP 4.7uF 6.3V ±10% 0603 (1608 Metric) Thickness 0.55mm SMD"
C36: library part CMP-1035-02018-1, "CAP 2.2nF 6.3V ±5% 0603 (1608 Metric) Thickness 1mm SMD"
C37: library part CMP-1035-01762-1, "CAP 680pF 6.3V ±5% 0603 (1608 Metric) Thickness 1mm SMD"
C38: library part CMP-1035-02679-1, "CAP 330nF 50V ±10% 0603 (1608 Metric) Thickness 1mm SMD"
C39: library part CMP-1035-01943-1, "CAP 1.5nF 6.3V ±5% 0603 (1608 Metric) Thickness 1mm SMD"
C41: library part CMP-1035-02591-1, "CAP 100nF 50V ±5% 0603 (1608 Metric) Thickness 1mm SMD"
C44: library part "CAP 47uF 50V", "Polarized Capacitor (Axial)"
C45: library part "CAP 150uF 25V", "Polarized Capacitor (Axial)"
CELL: library part JST_12_RIGHT
COMM: library part JST_7_RIGHT
D1: library part CMHZ5265B
D2: library part "D Schottky", "Schottky Diode"
D4: library part CMP-1055-00339-1, "Schottky Power Rectifier, 2-Pin SMB, Pb-Free, Tape and Reel"
D5 D6 D7 D8 D9 D10 D11 D12 D13 D14 D15 D16: library part CMP-1060-00726-1, "Zener Voltage Regulator, 300 mW, 2-Pin SOD-323, Tape and Reel"
D17: library part CMP-1060-00237-1, "Zener Voltage Regulator, 500 mW, 2-Pin SOD-123, Pb-Free, Tape and Reel"
D20: library part CMP-1060-00911-1, "Zener Voltage Regulator, 225 mW, 3-Pin SOT-23, Pb-Free, Tape and Reel"
L1: library part MURA-FB-2
L2: "Inductor"
L3: library part IHLP6767, "Inductor"
LED NTC1 NTC2: "Header, 2-Pin"
Q1 Q2 Q3 Q4 Q5 Q6 Q7 Q8 Q9 Q10 Q11 Q12 Q19 Q24: "P-Channel MOSFET"
Q13 Q14 Q15 Q16 Q17 Q18 Q20 Q21 Q22 Q23: "N-Channel MOSFET"
R1 R2 R3 R11 R12 R13: library part CMP-1012-00849-1, "1M 0.1W 1% 0603 (1608 Metric)  SMD"
R4 R10 R14 R16 R18 R20 R22 R24 R26 R28 R30 R32 R34 R36 R58 R59 R63: library part CMP-1012-00050-1, "100R 0.1W 5% 0603 (1608 Metric)  SMD"
R5: library part CMP-1012-00124-1, "120K 0.1W 5% 0603 (1608 Metric)  SMD"
R6: library part CMP-1012-00074-1, "1K 0.1W 5% 0603 (1608 Metric)  SMD"
R7: library part SHUNT, "Resistor"
R8 R9: library part CMP-1012-00122-1, "100K 0.1W 5% 0603 (1608 Metric)  SMD"
R15 R17 R19 R21 R23 R25 R27 R29 R31 R33 R35 R37: library part CMP-1012-00086-1, "3K3 0.1W 5% 0603 (1608 Metric)  SMD"
R38 R39 R40 R41 R42 R43 R44 R45 R46 R47 R48 R49: library part CMP-1018-00014-1, "3R3 1W 5% 2512 (6432 Metric)  SMD"
R50: library part CMP-1012-00650-1, "18K 0.1W 1% 0603 (1608 Metric)  SMD"
R51: library part CMP-1012-00572-1, "3K6 0.1W 1% 0603 (1608 Metric)  SMD"
R52 R53: library part CMP-1014-00171-1, "1R 0.25W 1% 1206 (3216 Metric)  SMD"
R54: library part CMP-1012-00680-1, "33K 0.1W 1% 0603 (1608 Metric)  SMD"
R55 R56: library part CMP-1012-00123-1, "110K 0.1W 5% 0603 (1608 Metric)  SMD"
R57 R60: library part CMP-1012-00152-1, "1M8 0.1W 5% 0603 (1608 Metric)  SMD"
R61: library part CMP-1017-00171-1, "1R 0.75W 1% 2010 (5025 Metric)  SMD"
R62: library part CMP-1012-00811-1, "464K 0.1W 1% 0603 (1608 Metric)  SMD"
R64: library part CMP-1012-00685-1, "36K 0.1W 1% 0603 (1608 Metric)  SMD"
R65 R67: library part CMP-1012-00098-1, "10K 0.1W 5% 0603 (1608 Metric)  SMD"
R66: library part CMP-1012-00087-1, "3K6 0.1W 5% 0603 (1608 Metric)  SMD"
R68: library part CMP-1018-00496-1, "750R 1W 1% 2512 (6432 Metric)  SMD"
SWITCH: "Header, 3-Pin"
U1: library part CMP-0471-00238-1, "Multicell Battery Stack Monitor, 60 V Vin MAX, 44-pin SOP (G-44), -40 to 125 degC, Pb-Free"
U3: library part TEENSY_3.0_BASIC
U4: library part PM-LINEREG-TC2117-IL4
U5: library part CMP-0359-00619-2, "Single Channel, High Voltage, Bidirectional Current Sense Amplifier, 2 MHz Typical GBW, 3 V/us Typical SR, 4.5 to 5.5 V, 8-Pin SOP (MS8-8), High Temperature / Automotive, Pb-Free, Reel"
U8: library part CMP-0479-00631-1, "Quad Protected High-Side MOSFET Driver, 8 to 48 V Vin, 20-pin SOIC (SW-20), -40 to 85 degC, Pb-Free"

## Free pads (board coordinates)
  round 201 hole 201: 2(2580,1240)

## Via types
v1: diameter 50, hole 28, Top Layer to Bottom Layer, 130 vias
v2: diameter 42, hole 20, Top Layer to Bottom Layer, 130 vias
v3: diameter 23.62, hole 11.81, Top Layer to Bottom Layer, 15 vias

## Nets (pads, with @x,y where several pads share a name; then routed paths per layer and width w, separated by ;. In a path a pad name is that pad's centre, name@x,y a point inside that pad or via, vN(x,y) a via of type N, cw(c..) or ccw(c..) an arc to the next point about the centre after c; other vN are vias at no path point)
5V: C20.2 C21.2 C28.2 C29.2 L2.2 LED.2 U2.9 U4.3 U5.1 U5.4 U6.1 | length 9458.1
  Top Layer w10: LED.2@3910,1260 4000,1170 4200.78,1170 4304.33,1273.55 L2.2@4304.33,1340 ; v1(4110,1620) 4132.48,1642.48 4173.85,1642.48 4180.24,1648.87 4180.24,1656.42 U2.9@4194.92,1671.1 ; L2.2@4304.33,1334.33 v1(4390,1420) ; U6.1@6527.38,2389.68 6555.39,2389.68 6568.41,2402.7 6568.41,2438.41 v2(6570,2440) v2@6570,2428.49 ; U5.4@6535.35,2636.61 6536.97,2635 6580,2635 ; U5.1@6535.35,2713.39 6566.61,2713.39 6580,2700 6580,2635 ; v2(6580,2590) 6580,2635
  Bottom Layer w10: C21.2@4050.94,1750 C20.2@4050.94,1590 ; v1(4264.72,1497.41) 4236.19,1525.94 4141.9,1525.94 4110,1557.85 v1(4110,1620) 4080.94,1620 C20.2@4050.94,1590 ; C29.2@6510,2407.56 C28.2@6560,2407.56 ; v2(6570,2440) 6571.91,2441.91 6621.91,2441.91 6661.91,2481.91 6661.91,2518.09 6590,2590 v2(6580,2590) 6580,2595 6551.81,2623.19 6551.81,3000.71 6229.8,3322.72 5740.92,3322.72 5726.39,3308.19 5673.61,3308.19 5649.99,3331.81 2611.81,3331.81 2466.95,3186.95 2466.95,2223.05 2516.62,2173.38 2553.38,2173.38 2610,2230 2930,2230 2959.48,2200.52 2959.48,2149.07 3115.05,1993.5 3630.77,1993.5 3904.27,1720 3920,1720 4050,1590 C20.2@4050.94,1590
ADC_CS: U3.20/A6 U6.9 | length 7253.8
  Top Layer w10: v1(2600,1960) 2512.28,1960 2452.28,2020 2452.28,3182.28 2641.91,3371.91 v2(5700,3371.91) ; v1(3000,1980) 3190,2170 U3.20/A6@3210,2170 ; U6.9@6712.62,2329.84 6714.56,2327.9 6714.56,2290.68 v2(6730,2290.68)
  Bottom Layer w10: v1(2600,1960) 2980,1960 v1(3000,1980) ; v2(5700,3371.91) 5701.47,3370.43 6249.57,3370.43 6743.72,2876.28 6743.72,2304.4 v2(6730,2290.68)
B+: R7.2 U5.2 | length 470.1
  Top Layer w10: R7.2@6265,2887.5 6265,2687.8 U5.2@6535.35,2687.8
C+: C42.2 C45.1 D17.1 R50.2 R52.2 R65.2 U7.7 U7.10 U7.36 | length 2252
  Top Layer w10: D17.1@4920,1564.37 4920,1514.37 5040,1394.37 v1(5040,1350) ; v2(5180,1610) 5185.12,1610 5215.28,1640.16 U7.7@5281.73,1640.16 ; v2(5229.69,1525.21) 5229.69,1555.31 5255.48,1581.1 U7.10@5281.73,1581.1 ; C42.2@5302.44,1970 5273.31,1940.87 v1(5273.31,1910) 5338.43,1910 5375.21,1873.22 5375.21,1828.79 5370.31,1823.89 U7.36@5370.31,1797.64
  Bottom Layer w10: R50.2@4920,1450 4940,1450 v1(5040,1350) ; 5027.56,1317.56 5040,1305.12 v1(5040,1290) ; v1(5100,1350) 5100,1375.52 5070,1405.52 5037.76,1437.76 5070,1470 5131.91,1531.91 5223,1531.91 v2(5229.69,1525.21) ; v2(5180,1610) 5154.09,1635.91 5154.09,1854.09 5210,1910 v1(5273.31,1910) 5273.31,1929.09 5260.16,1942.24 R52.2@5260.16,1970
  Bottom Layer w140: 5070,1330 5070,1405.52 5070,1470 5070,1840
  other v1: 5040,1230 5100,1230 5100,1290 5010,1660
CELL1: CELL.12 Q12.3 R36.2 R48.1 | length 1215.1
  Top Layer w15: CELL.12@3760.16,3128.58 3810.16,3178.58 3826.57,3178.58 3827.16,3177.99 3892.05,3177.99 3969.41,3100.63 Q12.3@3991.85,3100.63 3991.85,3077 v2(4008.85,3060) 4011.84,3062.99 4429.42,3062.99 4463.79,3028.63 4640.59,3028.63 R48.1@4761.96,3150
  Bottom Layer w15: v2(4008.85,3060) 4042.36,3093.5 R36.2@4042.36,3110
CELL2: CELL.11 Q11.3 R34.2 R47.1 | length 1859.7
  Top Layer w15: CELL.11@3681.16,3128.58 3781.16,3228.58 4024.82,3228.58 4025.58,3229.35 4322.12,3229.35 4450.84,3100.63 Q11.3@4461.85,3100.63 4461.85,3082 v2(4478.85,3065) 4482.53,3068.68 4568.35,3068.68 4763.25,3263.58 4994.45,3263.58 5108.04,3150 R47.1@5231.96,3150
  Bottom Layer w15: v2(4478.85,3065) 4478.85,3075 4512.36,3108.5 R34.2@4512.36,3110
CELL3: CELL.10 Q10.3 R32.2 R46.1 | length 1994
  Top Layer w15: v2(4836.57,3228.58) 4836.57,3188.33 4895.8,3129.09 4903.39,3129.09 Q10.3@4931.85,3100.63 4931.85,3077 v2(4948.85,3060) ; v2(5196.57,2918.58) 5231.96,2883.19 R46.1@5231.96,2825
  Bottom Layer w15: CELL.10@3602.68,3128.58 3727.68,3253.58 4811.57,3253.58 v2(4836.57,3228.58) ; R32.2@4982.36,3110 4982.36,3093.5 v2(4948.85,3060) 5055.15,3060 v2(5196.57,2918.58)
CELL4: CELL.9 Q9.3 R30.2 R45.1 | length 1710.6
  Top Layer w15: v2(4721.57,2888.58) 4754.68,2855.47 R45.1@4754.68,2823.58 4755.54,2823.58 4834.9,2744.22 4878,2744.22 4909.41,2775.63 Q9.3@4931.85,2775.63 4931.85,2752 v2(4948.85,2735)
  Bottom Layer w15: CELL.9@3523.68,3128.58 3666.87,2985.39 3901.1,2985.39 3932.32,2954.18 4236.03,2954.18 4290.23,2899.98 4680.36,2899.98 4691.76,2888.58 v2(4721.57,2888.58) ; v2(4948.85,2735) 4982.36,2768.5 R30.2@4982.36,2785
CELL5: CELL.8 Q8.3 R28.2 R44.1 | length 1346.7
  Top Layer w15: v2(4256.57,2873.58) 4252.57,2873.58 4252.57,2872.58 4284.68,2840.47 R44.1@4284.68,2823.58 4284.68,2815.74 4357.62,2742.81 4423.16,2742.81 Q8.3@4454.57,2774.21 4454.57,2750.58 v2(4476.57,2728.58) v2@4490.25,2742.26
  Bottom Layer w15: CELL.8@3444.68,3128.58 3608.77,2964.49 3761.47,2964.49 3825.98,2899.98 4210.36,2899.98 4236.76,2873.58 v2(4256.57,2873.58) ; v2(4476.57,2728.58) 4505.07,2757.09 R28.2@4505.07,2783.58
CELL6: CELL.7 Q7.3 R26.2 R43.1 | length 943.3
  Top Layer w15: v2(3791.57,2873.58) 3791.57,2878.58 3809.68,2860.47 R43.1@3809.68,2823.58 3809.68,2820.74 3887.62,2742.81 3930.72,2742.81 3962.13,2774.21 Q7.3@3984.57,2774.21 3984.57,2750.58 v2(4006.57,2728.58)
  Bottom Layer w15: CELL.7@3365.94,3128.58 3550.94,2943.58 3721.57,2943.58 v2(3791.57,2873.58) ; v2(4006.57,2728.58) 4035.07,2757.09 R26.2@4035.07,2783.58
CELL7: CELL.6 Q6.3 R24.2 R42.1 | length 2436.9
  Top Layer w15: v2(3428.66,2868.58) 3431.57,2865.68 3431.57,2844.62 3501.98,2774.21 Q6.3@3509.57,2774.21 3509.57,2750.58 3526.57,2733.58 v2(3531.57,2733.58) v2@3540.25,2742.26 ; v2(5181.57,2513.58) 5181.57,2466.69 R42.1@5229.68,2418.58
  Bottom Layer w15: CELL.6@3287.2,3128.58 3428.66,2987.12 v2(3428.66,2868.58) ; R24.2@3560.07,2783.58 3560.07,2757.09 3536.57,2733.58 v2(3531.57,2733.58) 3621.88,2643.27 4352.41,2643.27 4352.72,2643.58 5051.57,2643.58 v2(5181.57,2513.58)
CELL8: CELL.5 Q5.3 R22.2 R41.1 | length 2501.7
  Top Layer w15: v2(4701.57,2523.58) 4754.68,2470.47 R41.1@4754.68,2418.58 4754.68,2415.74 4832.62,2337.81 4898.16,2337.81 Q5.3@4929.57,2369.21 4929.57,2345.58 v2(4946.57,2328.58)
  Bottom Layer w15: CELL.5@3208.98,3128.58 3208.98,2636.99 3276.98,2568.99 4656.16,2568.99 v2(4701.57,2523.58) ; v2(4946.57,2328.58) 4980.07,2362.09 R22.2@4980.07,2378.58 R22.2@4986.44,2384.95
CELL9: CELL.4 Q4.3 R20.2 R40.1 | length 2071
  Top Layer w15: v2(4226.57,2518.58) 4279.68,2465.47 R40.1@4279.68,2408.58 4286.84,2408.58 4357.62,2337.81 4423.16,2337.81 Q4.3@4454.57,2369.21 4454.57,2350.58 v2(4476.57,2328.58)
  Bottom Layer w15: CELL.4@3129.98,3128.58 3128.85,3127.46 3128.85,2685.87 3130.54,2685.87 3268.42,2547.99 3765.82,2547.99 3795.23,2518.58 v2(4226.57,2518.58) ; v2(4476.57,2328.58) 4476.57,2350.08 R20.2@4505.07,2378.58
CELL10: CELL.3 Q3.3 R18.2 R39.1 | length 1649.2
  Top Layer w15: v2(3776.57,2488.58) 3781.57,2488.58 3809.68,2460.47 R39.1@3809.68,2408.58 3811.84,2408.58 3882.62,2337.81 3948.16,2337.81 Q3.3@3979.57,2369.21 3979.57,2340.58 v2(3996.57,2323.58)
  Bottom Layer w15: CELL.3@3050.98,3128.58 3107.48,3072.09 3107.48,2677.68 3266.57,2518.58 3506.2,2518.58 3514.7,2527.08 3738.07,2527.08 v2(3776.57,2488.58) ; v2(3996.57,2323.58) 4030.07,2357.09 R18.2@4030.07,2368.58
CELL11: CELL.2 Q2.3 R16.2 R38.1 | length 1220.5
  Top Layer w15: R38.1@3339.68,2398.58 3400.46,2337.81 3478.16,2337.81 Q2.3@3509.57,2369.21 3516.57,2362.21 3516.57,2338.58 3536.57,2318.58 v2(3536.57,2313.58)
  Bottom Layer w15: CELL.2@2972.24,3128.58 3086.57,3014.25 3086.57,2653.78 3336.57,2403.78 v2(3336.57,2398.58) ; v2(3536.57,2313.58) 3560.07,2337.09 R16.2@3560.07,2368.58
CELL12: CELL.1 Q1.3 R14.2 | length 1062.3
  Top Layer w15: v2(2931.57,2453.58) 2936.57,2448.58 2950.2,2448.58 2972.16,2426.62 2972.16,2419.03 3039.57,2351.62 3039.57,2330.58 v2(3056.57,2313.58)
  Bottom Layer w15: CELL.1@2893.5,3128.58 2959.09,3062.99 2975.82,3062.99 3055.98,2982.83 3055.98,2734.4 2989.98,2668.4 2989.98,2560.96 2931.57,2502.55 v2(2931.57,2453.58) ; v2(3056.57,2313.58) 3056.57,2325.08 R14.2@3090.07,2358.58
GND: C1.1 C3.1 C4.1 C5.1 C6.1 C7.1 C8.1 C9.1 C10.1 C11.1 C12.1 C13.1 C14.1 C15.1 C16.1 C17.1 C18.1 C19.2 C20.1 C21.1 C22.1 C23.1 C24.1 C25.1 C26.1 C27.1 C28.1 C29.1 C30.2 C31.2 C33.2 C34.2 C35.1 C37.2 C41.1 C42.1 C43.1 C44.2 C45.2 D1.2 D2.1 D16.2 D17.2 NTC1.1 NTC2.1 Q18.1 Q20.3 Q22.3 R4.1 R5.2 R49.1 R51.1 R53.1 R64.1 R66.1 U1.29 U1.31 U2.6 U2.8 U2.12 U2.17 U3.GND U4.1 U5.5 U6.5 U6.7 U7.3 U7.4 U7.11 U7.14 U7.29 U7.35 U7.39 U8.1 U8.10 | length 2914
  Top Layer w10: U1.31@2890.78,2921.46 2890.78,2956.63 2911.57,2977.42 ; U1.29@2930.15,2921.46 2930.15,2956.63 2911.57,2975.22 2913.2,2975.22 2961.57,3023.58 v2(2961.57,3028.58) ; U2.8@4085.08,1671.1 4103.45,1671.1 4113.7,1681.35 4113.7,1706.61 4106.61,1706.61 4110.47,1710.47 ; U2.6@4085.08,1710.47 4110.47,1710.47 ; U2.12@4194.92,1730.16 4149.84,1730.16 U2.17@4140,1740 4110.47,1710.47 ; v2(5208.09,1760) 5249.2,1718.9 U7.3@5281.73,1718.9 ; U7.11@5281.73,1561.42 5307.98,1561.42 U7.39@5349.98,1603.41 ; U7.4@5281.73,1699.21 U7.3@5281.73,1718.9 ; v2(5340,1450) 5350.63,1460.63 U7.14@5350.63,1502.36 5350.63,1610.63 v3(5390,1650) ; v1(5455,1940) 5405.75,1890.75 C35.1@5405.75,1890 5391.12,1875.37 5391.12,1798.76 U7.35@5390,1797.64 v3(5390,1736.61) v3(5390,1693.31) v3(5390,1650) ; U7.29@5498.27,1718.9 5458.9,1718.9 v3(5433.31,1693.31) v3(5390,1650) ; U7.3@5281.73,1718.9 5321.1,1718.9 v3(5346.69,1693.31) v3(5390,1650)
  Top Layer w20: 4920,1262.44 4922.44,1260 v2(4960,1260)
  Bottom Layer w10: C1.1@2571.57,2850.59 2571.57,2831.46 2587.95,2815.08 2587.95,2762.85 2594.34,2756.46 2778.8,2756.46 2788.48,2766.13 2788.48,2850.59 C3.1@2816.57,2850.59 2818.07,2852.09 C4.1@2901.57,2852.09 C5.1@2971.57,2852.09 ; D1.2@2800.94,2433.58 D1.2@2810.86,2423.66 ; v2(2961.57,3028.58) 2966.57,3028.58 3002.16,2992.99 3002.16,2892.85 2995.77,2886.46 2971.57,2886.46 C5.1@2971.57,2852.09 ; R4.1@2971.57,2781.14 C5.1@2971.57,2852.09 ; v2(5208.09,1760) 5220.54,1747.56 C34.2@5290,1747.56 5432.44,1890 5500,1890 5520,1910 5520,1949.84 R53.1@5520.16,1950
  Bottom Layer w20: 4920,1260 R51.1@4920,1294.88 4954.88,1294.88 4960,1300 ; C27.1@6620,2721.5 v1(6620,2750) ; C43.1@6635,2348.5 C22.1@6695,2348.5
  other v1: 5530,1160 5600,1160 5670,1160 4500,1200 4190,1210 5530,1220 5600,1220 5670,1220 5740,1220 5530,1280 5600,1280 5670,1280 5740,1280 3420,1310 5600,1340 5670,1340 5740,1340 5330,1350 2600,1420 4189.76,1486.29 4400,1530 4820,1590 6260,1590 4500,1620 3550,1660 2710,1740 4690,1740 4770,1830 3000,1840 4350,1890 5240,2060 3730,2070 4420,2150 5130,2150 4020,2180 6670,2235 4720,2240 3806.57,2293.58 5460,2440 4896.57,2588.58 6160,2670 5201.57,2683.58 3276.57,2853.58 3781.57,3043.58 6700,3076.26 5900,3110 5960,3110 6020,3110 4281.57,3113.58 5900,3170 5960,3170 6020,3170 6080,3170 3330,3210 5380,3230 5900,3230 5960,3230 6020,3230 6080,3230 6140,3230 6330,3360
  other v2: 5185,1500 5530,1970 2810.36,2383.1 6680,2550 3791.57,2718.58 3426.57,2723.58
  other v3: 5346.69,1563.39 5390,1563.39 5433.31,1563.39 5346.69,1606.69 5390,1606.69 5433.31,1606.69 5346.69,1650 5433.31,1650 5346.69,1736.61 5433.31,1736.61
L+: Q13.2 Q14.2 R68.1
  other v1: 6615,1335 6675,1335 6615,1395 6675,1395
LOAD_GATE: Q13.1 Q14.1 U8.18 | length 2003.2
  Top Layer w10: U8.18@4901.1,2055 5005,2055 5070,1990 5070,1520 5175,1415 5463.22,1415 5480.12,1431.91 5860,1431.91 v2(5860,1425)
  Bottom Layer w10: v2(5860,1425) v2(6350,1425)
LOAD_SWITCH: U3.17/A3 U8.3 | length 1105.5
  Top Layer w10: U3.17/A3@3510,2170 3660,2020 3950,2020 3960,2030 4445,2030 4470,2055 U8.3@4538.9,2055
NetC2_2: C2.2 R10.1 U1.4 | length 368.2
  Top Layer w10: v2(2641.57,2518.58) 2641.57,2548.58 2693.93,2600.95 U1.4@2693.93,2655.71
  Bottom Layer w10: C2.2@2576.57,2336.14 R10.1@2576.57,2401.02 2633.38,2457.83 2633.38,2493.5 2641.57,2501.69 v2(2641.57,2518.58)
NetC5_2: C5.2 R8.2 R9.2 U1.34 | length 674.6
  Top Layer w10: U1.34@2831.73,2921.46 2831.73,2963.06 2819.54,2975.25 2819.54,3001.68 2843.35,3025.49 2888.48,3025.49 v2(2896.57,3033.58)
  Bottom Layer w10: R8.2@2651.57,2850.59 R9.2@2736.57,2850.59 2763.75,2850.59 2793.86,2880.71 2937.2,2880.71 C5.2@2971.57,2915.08 2971.57,2963.46 2901.45,3033.58 v2(2896.57,3033.58)